# Altium PCB shkb.PcbDoc (part 2 of 3)
Units mil, origin at the board's own origin, x right, y up, seen from the top; angles counter-clockwise.
Board outline 5570.88 x 1417.33 mil, 4 copper layers (COMPONENT, GND1, GND2, SIGNAL), stack 63.78 mil thick; 142 components, 135 nets, 597 pads, 700 vias.
Unrouted connection lines stored in the file: 1.
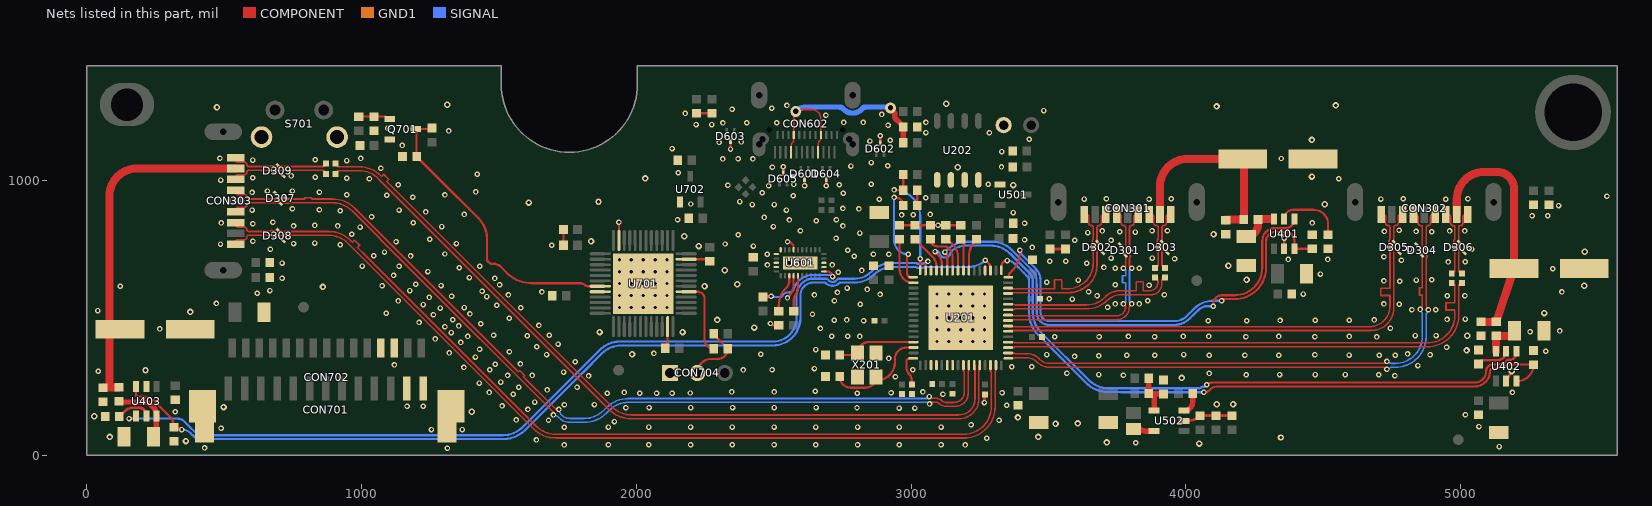
[diagram p4: the nets of this part, all layers, seen from the top]

## Via types
v1: diameter 20, hole 10, COMPONENT to SIGNAL, tented both sides, 543 vias
v2: diameter 23.62, hole 11.81, COMPONENT to SIGNAL, tented both sides, 94 vias
v3: diameter 20, hole 11.81, COMPONENT to SIGNAL, 28 vias
v4: diameter 23.62, hole 11.81, COMPONENT to SIGNAL, tented bottom, 25 vias
v5: diameter 39.37, hole 19.68, COMPONENT to SIGNAL, tented both sides, 10 vias

## Nets (pads, with @x,y where several pads share a name; then routed paths per layer and width w, separated by ;. In a path a pad name is that pad's centre, name@x,y a point inside that pad or via, vN(x,y) a via of type N, cw(c..) or ccw(c..) an arc to the next point about the centre after c; other vN are vias at no path point) (continued)
GND: C201.1 C202.1 C203.2 C204.1 C205.1 C206.1 C207.1 C208.1 C209.1 C210.1 C211.1 C212.1 C213.1 C214.1 C215.1 C216.1 C217.1 C301.1 C304.1 C307.1 C310.1 C311.1 C312.1 C313.1 C314.1 C315.1 C401.1 C402.1 C403.1 C404.1 C405.1 C406.1 C407.1 C408.1 C409.1 C501.1 C502.1 C503.1 C504.1 C505.1 C507.1 C508.1 C601.1 C602.1 C607.1 C702.2 C703.1 C704.1 C705.1 C706.1 C707.1 C708.1 C709.1 CON201.2 CON701.1 CON701.2 CON701.14 CON702.12 CON702.13 CON702.16 CON704.1 D301.3 D302.3 D303.3 D304.3 D305.3 D306.3 D307.3 D308.3 D309.3 D601.3 D602.3 D603.3 D604.3 D605.3 L304.1 L305.1 L306.1 L602.1 Q701.2 R205.2 R206.1 R207.1 R208.1 R209.1 R210.1 R214.1 R401.2 R402.2 R403.2 R404.2 R405.2 R406.2 R503.2 R604.2 R702.2 R703.2 S701.3 U201.65 U202.1 U202.2 U202.3 U202.4 U401.2 U402.2 U403.2 U501.1 U502.2 U601.4 U601.12 U601.13 U601.22 U601.28 U601.29 U601.31 U701.8 U701.23 U701.35 U701.47 U702.1 X201.2 X201.4 | length 1877.5
  COMPONENT w7.87: C704.1@1734.41,764 C706.1@1734.41,821 ; v1@1936,848 v1(1936.26,848) U701.47@1936.26,790.66 ; C703.1@2104.41,389 ccw(c2104.41,398.02) 2113.43,398.02 U701.23@2113.43,457.98 ; U701.35@2191.18,712.9 2259.51,712.9 cw(c2259.51,705.41) C705.1@2267,705.41 ; v1(2342.52,1113.95) D603.3@2342.52,1141.73 ; v1(2488,479) 2494.59,472.41 R604.2@2518,472.41 ; D605.3@2534.42,1026.06 v1(2534.43,1049.69) ; v1(2550,777) cw(c2550,754.62) 2572.38,754.62 U601.22@2572.38,747.24 ; v1(2611.98,980.31) D601.3@2612,1003.94 ; v1(2690.98,980.31) D604.3@2691,1003.94 ; U401.2@4358,750.87 v1(4358,789)
  COMPONENT w8: v1@2550,578 v1(2550,572) 2551.74,573.74 ccw(c2501.91,623.57) 2572.38,623.57 U601.4@2572.38,652.76 ; v1(2735,666) v1@2735,671
  COMPONENT w10: L602.1@2218.5,1244.09 C315.1@2275.5,1244.09 ; D602.3@2887.22,1134.52 v1(2887.22,1162.3) ; C210.1@2919.02,689.02 C210.1@2919.02,697.98 ; C203.2@2958.02,836.61 R209.1@3070,836.61 R214.1@3126,836.61 R208.1@3181,836.61 ; R210.1@3022.59,908 R205.2@3022.6,964 ; v1(3267,191) 3267,219.28 C217.1@3269,221.28 ; L304.1@3505,750.41 C314.1@3562,750.41 ; U502.2@3992.88,124.28 4005.12,124.28 ccw(c4005.12,190.58) 4052,143.7 C504.1@4110,143.7 C508.1@4168,143.7 ; U402.2@5165.83,269.42 v2(5186,306)
  COMPONENT w19.68: C301.1@4144.41,804 C301.1@4145,803.41 ; C403.1@4220,689.85 C403.1@4226,683.85
  GND1 w8: v3(3094.08,456.44) v3(3137.39,456.44) ; v3(3137.39,499.75) v3(3137.39,543.06) ; v3(3137.39,586.36) v3(3137.39,543.06) ; v3(3180.69,586.36) v3(3180.69,543.06) ; v3(3224,413.14) v3(3224,456.44) ; v3(3224,499.75) v3(3224,456.44) ; v3(3224,543.06) v3(3224,586.36) ; v3(3267.31,456.44) v3(3224,456.44) ; v3(3137.39,543.06) v3(3180.69,543.06) ; v3(3180.69,543.06) v3(3180.69,499.75) v3(3180.69,456.44) v3(3224,456.44)
  GND1 w10: v3(3094.08,499.75) v3(3137.39,499.75) ; v3(3224,499.75) v3(3224,543.06)
  other v1: 1312,25 428,26 5141,31 1737,37 3197,37 1898,38 2045,38.01 2197,38.02 2349,38.02 2501,38.03 2653,38.04 2805,38.05 2957,38.06 3109,38.06 3818,45 1636,55 3275,61 1254,93 1366,93 488,98 1737,100.99 1898,101.99 2045,102 2197,102.01 2349,102.02 2501,102.02 2653,102.03 2805,102.04 2957,102.05 3109,102.06 5067,104 3218,110 1920,122 1680,127 3320,127 1563,128 5018,147 321,158 1605,166 2956,171 3014,171 1962,172 2803,172 2046,172.96 2198,172.97 2350,172.98 2502,172.98 2654,172.99 1164.95,178 1224,178 1511,179 3348,181 1738,183 1847,184 1630,193 1552,221 3116,221 1894,225 2012,225 2073.5,225 2130,225 2804,225 2196,226 2927,227 3330.99,227 1464,228 1956,228 5189,228 2347,230 2502,230 3043,230 2651,232 1675,237 1572,247 1784,247 1428,262 1506,266 2943,285 1826,288 4761,289 1531,290 1621,290 3773,291 4220,292 4702,292 3683,293 4341,293 4471,293 4580,293 4085,297 3567,298 1735,302 41,305 2389,310 1466,311 2494,311 3006,311 2648,315 1372,319 3366,322 3439,322 4845,326 1119,328 1486,331 1578,332 1777,340 2919,352 1414,357 3595,359 3683,362 3785,363 3887,363 4085,363 4215,363 4338,363 4704,363 4762,363 4594,364 4470,365 4889,365 1673,366 3494,366 3992,366 2453,367 4807,368 2064,370 1319,372 1538,376 5310,378 2653,384 1429,385 4949,393 1637,394 1715,404 1361,410 1268,423 4695,430 3523,431 3684,431 3886,431 4219,431 4470,431 1386,432 2813,432 3791,432 3991,432 4083,432 4338,432 4595,432 2711,433 2769,433 1603,434 4835,435 4911,435 1480,436 1683,436 1326,446 5253,449 5361,452 265,459 2670,461 4745,462 1303,467 1353,470 1645,472 1433,478 1209,483 2827,489 4082,489 4222,489 4343,490 2720,491 4471,491 4595,491 2766,492 4686,492 1331,493 4951,494 5017,495 1537,498 1261,511 2641,513 1394,514 1089,516 39,526 4823,529 4910,529 1286,535 1579,536 1373,537 3715,538 1492,545 1224,548 2815,549 4777,549 3743,550 3830,550 4721,550 471,552 1133,561 2721,562 3861,562 3587,568 3503,569 1246,574 1455,577 1327,578 3677,580 4952,580 5016,580 1534,583 2648,583 3922,584 2887,585 4427,586 620,589 2732,592 1656,594 5369,594 3646,595 1438,596 666,599 1175,599 2840,603 2767,608 121,615 1074,616 1289,617 3866,618 1502,620 3743,620 1197,622 3494,629 4779,633 4721,634 3608,637 4839,637 4895,638 1484,643 710,644 1392,646 1116,654 4490,659 1241,668 2820,672 5336,678 3743,680 3830,680 1355,682 3702,683 1136,687 1430,687 1002,688 2477,692 2713,692 3639,698 710,699 4955,703 5017,704 3505,706 3563,706 4785,709 4373,712 4517,712 3959,715 3728,717 3878,717 4721,722 2793,724 1178,725 1044,726 2476,731 2863,731 2919.1,731 1303,732 1083,739 2769,746 4815,748 668,749 5040,750 3441,756 2426,761 1692,764 922,766 486,768 2322.82,768.38 752,770.01 1345,770 829,772.01 1125,777 604,778.01 3596,782 3728,782 3413,784 1248,786 2727,789 2370.82,802.38 964,804 2813,808 3643,810 3816,812 3759,813 4895,813 4723,814 4838,814 3696,816 4960,816 5015,816 2597,817 3877,817 3933,817 4776,818 994,830 1291,832 2499,832 752,834 913,834 2752,834 829,836 3098,837 604,842 3413,844 489,845 4460,845 1188,846 677,848 2655,853 2557,856 2150,857 2728,857 2465,865 1036,868 5260.27,871 5317.35,871 2965,874 3008,875 1373,876 3070,876 3372,883 1233,885 922,889 601,892.01 1136,892 2546,892 846,893.01 2810,896 748,897.01 2752,898 5356.76,908.41 2422,912 2502,912 2198,914 2376,923 2884,931 3866,931 4946.12,931 3630,932 4710.12,932 3711,933 3947,933 4791.12,933 5027.12,933 3053,937 1186,939 5533,942 2571,944 1091,946 1303,947 946,948 2753,953 2458,955 601,956 846,957 1415,958 657,961 748,961 2481,980 2333,982 1133,984 2738,984 2573,985 2855,986 3281,986 487,1001 1028,1006 4557,1006 946,1008.01 603,1010.01 831,1011.01 744,1016 1421,1022 2152,1028 1070,1044 2495,1048 3329,1049 2781,1052 2915,1053 2855,1065 946,1072 603,1074 831,1075 2314,1078 2424,1078 2370,1079 997,1080 4347.65,1079.64 484,1081 3330,1105 2130,1116 1148,1127 2301,1138 2382,1140 2850,1143 2924,1146 3430,1150 3285,1173 3054,1174 1317,1180 1095,1189 2916,1201 2217,1203 2274,1203 2315,1209 2401.95,1209.67 2511,1210 2755,1211 2826,1211 3054,1211 2690,1237 2893,1240 2177.4,1243.6 3483,1254 2348,1259 2493,1263 2548,1273
  other v2: 4049,42 3712,46 360,51 4346,64 83,66 3463,66 3526,114 3607,115 3389,137 26,141 1401,158 497,175 4113,185 4172,185 3985,281 213,309 1984,367 5022,381 5024,434 1866,448 2168,448 2429,464 2294,492 5305,517 376,521 859,612 2248,615 5450,616 2367,622 4221,638 2322,673 4155,689 5452,740 2227,761 1835,778 2174,797 4101,804 4506,913 1608,919 1862,922 3372,983 2032,1007 4459,1014 3170,1048 4459,1147 473,1266 4112,1269 4546,1273 1311,1275 3128,1279
  other v3: 3094.08,413.14 3137.39,413.14 3180.69,413.14 3267.31,413.14 3267.31,499.75 3094.08,543.06 3267.31,543.06 3094.08,586.36 3267.31,586.36 2556.63,700 2596,700 2635.37,700
  other v4: 1938.23,537.7 1981.54,537.7 2024.84,537.7 2068.15,537.7 2111.46,537.7 1938.23,581.01 1981.54,581.01 2024.84,581.01 2068.15,581.01 2111.46,581.01 1938.23,624.31 1981.54,624.31 2024.84,624.31 2068.15,624.31 2111.46,624.31 1938.23,667.62 1981.54,667.62 2024.84,667.62 2068.15,667.62 2111.46,667.62 1938.23,710.93 1981.54,710.93 2024.84,710.93 2068.15,710.93 2111.46,710.93
LED: R705.2 U701.29 | length 272.6
  COMPONENT w8: U701.29@2191.18,594.79 2222.21,594.79 cw(c2222.21,569) 2248,569 2248,420.41 ccw(c2281.41,420.41) R705.2@2281.41,387
NetC201_2: C201.2 U201.62 X201.1 | length 386.8
  COMPONENT w8: C201.2@2739.59,286 ccw(c2780.59,286) 2780.59,245 2832.77,245 ccw(c2832.77,284.69) X201.1@2872.46,284.69 ; X201.1@2874,271.69 2874.46,271.69 ccw(c2874.46,338.23) 2941,338.23 2941,350 cw(c2982.48,350) 2982.48,391.48 U201.62@3008.45,391.48
NetC202_2: C202.2 U201.61 X201.3 | length 299.6
  COMPONENT w8: C202.2@2739.59,364 2798.23,364 ccw(c2798.23,371.31) X201.3@2805.54,371.31 cw(c2845.4,371.31) 2845.4,411.17 U201.61@3008.45,411.17 ; X201.3@2804.84,361 X201.3@2807.54,358.31
NetC203_1: C203.1 U201.50 | length 242.5
  COMPONENT w8: 2958,726.31 2958,744.98 ; C203.1@2958,785.37 2958,749 ; C203.1@2958,785.41 2958,749 ; U201.50@3008.45,627.7 3003.3,627.7 cw(c3003.3,668) 2982.54,633.46 cw(c3003.3,668) 2973.49,640.88 cw(c3010.88,678.28) 2958,678.28 2958,726.27 2958,744.98 ; 2958,744.98 2958,749
NetC301_2: C301.2 C310.2 CON301.1 L301.2 | length 750.9
  COMPONENT w29.53: CON301.1@3906.1,875.98 3906.1,978 cw(c4006.1,978) 4006.1,1078 C310.2@4207.05,1078 cw(c4207.05,1073.64) 4211.41,1073.64 L301.2@4211.41,858 4148.41,858 ccw(c4148.41,854.59) C301.2@4145,854.59
NetC304_2: C304.2 C311.2 CON302.1 L302.2 | length 906.9
  COMPONENT w29.53: CON302.1@4986.22,875.98 4986.22,931 cw(c5086.22,931) 5086.22,1031 5133,1031 cw(c5133,969) 5195,969 5195,679 C311.2@5194.88,679 L302.2@5130,485.09 C304.2@5074,485.09
NetC307_2: C307.2 C312.2 CON303.1 L303.2 | length 1259.5
  COMPONENT w29.53: C307.2@58,245.59 113.59,245.59 ccw(c113.59,249) L303.2@116,246.59 ; 81.89,258.62 81.89,943.31 cw(c181.89,943.31) 181.89,1043.31 CON303.1@541.34,1043.31
NetC403_2: C403.2 L301.1 U401.6 | length 135
  COMPONENT w29.53: C403.2@4220,796.15 ccw(c4220,838.74) 4262.59,838.74 L301.1@4262.59,858 4263.72,859.13 U401.6@4311,859.13
NetC406_2: C406.2 L302.1 U402.6 | length 134.4
  COMPONENT w29.53: U402.6@5128.43,377.69 5128.43,432.33 cw(c5130,432.33) L302.1@5130,433.91 5178.04,433.91 ccw(c5178.04,452.55) C406.2@5196.68,452.55
NetC409_2: C409.2 L303.1 U403.6 | length 242.1
  COMPONENT w19.68: L303.1@116,195.41 ccw(c118.02,195.41) 118.02,193.39 201.87,193.39 cw(c201.87,141.87) U403.6@253.4,141.87 ; C409.2@251.4,80.75 U403.6@251.4,154.87
NetC506_1: C506.1 R502.2 R503.1 U502.4 | length 171.6
  COMPONENT w20: R502.2@3864.59,280 cw(c3864.59,279) 3865.59,279 C506.1@3865.59,224 ccw(c3867.18,224) 3867.18,222.41 3884.62,222.41 ; U502.4@3884.62,161.69 3884.62,222.41 ; R503.1@3919,222.41 3884.62,222.41
NetC601_2: C601.2 CON602.A4 CON602.A9 CON602.B4 CON602.B9 L601.1 | length 980
  COMPONENT w6: CON602.A9@2563.07,1102.36 2563.07,1125.1 cw(c2579.9,1125.1) 2568,1137 ccw(c2556.14,1148.86) 2572.91,1148.86 CON602.B4@2572.91,1165.35 2572.91,1233.89 cw(c2597.11,1233.89) v5@2577.95,1248.67 ; v5@2577.95,1251 v5@2577.95,1248.67 ; CON602.A4@2661.5,1102.36 2661.5,1131.13 cw(c2676.87,1131.13) 2666,1142 ccw(c2653.11,1154.89) 2671.34,1154.89 CON602.B9@2671.34,1165.35 2671.34,1224.66 ccw(c2638,1224.66) 2638,1258 2587,1258 ccw(c2587,1251) 2580,1251 ccw(c2597.11,1233.89) v5@2577.95,1248.67
  COMPONENT w19.68: v5(2925,1264) 2927.91,1261.09 cw(c2881.82,1215) 2939.82,1244.74 2939.82,1234.27 ccw(c2955.66,1234.27) 2946.7,1221.2 2971.41,1196.5 C601.2@2971.41,1194 L601.1@2971.41,1137.02
  SIGNAL w19.68: v5(2925,1264) ccw(c2922,1264) v5@2922,1267 ; 2596.76,1262.43 cw(c2618.63,1212.37) 2618.63,1267 2738.24,1267 cw(c2738.3,1247.31) 2753.06,1260.34 ccw(c2787.09,1290.35) 2821.11,1260.34 cw(c2835.87,1247.31) 2835.93,1267 2866.88,1267 ; 2596.76,1262.43 ccw(c2618.63,1212.37) 2580,1251 2585.33,1251 2596.76,1262.43 ; 2866.88,1267 ccw(c2866.82,1247.31) 2866.82,1267 v5@2922,1267 ; 2866.88,1267 v5@2922,1267
  other v5: 2580,1251
NetC701_2: C701.2 Q701.1 R703.1 | length 114.9
  COMPONENT w8: C701.2@989.24,1232.19 1082.23,1232.19 cw(c1082.23,1204.23) Q701.1@1102,1224
NetCON704_2: CON704.2 R704.2 R705.1 | length 236.6
  COMPONENT w8: CON704.2@2222,299 cw(c2273,299) 2273,350 2295.59,350 ccw(c2295.59,387) R705.1@2332.59,387 2284.11,435.48 cw(c2290.63,442) R704.2@2281.41,442
NetL501_1: L501.1 U502.5 | length 66.9
  COMPONENT w20: L501.1@3822.06,103 ccw(c3860.97,141.91) 3860.97,86.88 U502.5@3884.62,86.88
NetR201_2: R201.2 U201.39 | length 123.1
  COMPONENT w8: U201.39@3210.22,671.99 3210.22,721.22 cw(c3298.18,721.22) 3235.98,783.42 R201.2@3238,785.43 R201.2@3238,787.41
NetR204_1: R204.1 R205.1 U201.48 | length 440.7
  COMPONENT w8: v1(2938,965) 2971.59,965 2973,966.41 2972.41,967 ccw(c2972.41,965.59) 2971,965.59 2971,1021 R204.1@2971.41,1021 ; U201.48@3033.06,672.98 v1(3033.06,714.38)
  SIGNAL w8: v1(2938,965) cw(c2938,869.94) 3033.06,869.94 3033.06,821 v1(3033.06,714.38)
NetR206_2: R206.2 U201.64 | length 120.7
  COMPONENT w7.99: R206.2@3002.01,256.73 R206.2@3003,257.72 3002.01,258.7 3002.01,274.12 ccw(c2974.22,274.12) 2991.12,296.19 cw(c3006,311) 2990.62,296.7 cw(c3006,311) 2985.65,305.81 ccw(c2975.96,303.34) 2985.34,306.81 cw(c3020.56,319.86) 2985,307.77 cw(c3020.56,319.86) 2983,319.86 2983,326 2983,340.91 cw(c2993,340.91) 2989.24,350.18 cw(c2999.11,326) 2999.11,352.11 U201.64@3007.47,352.11
NetR207_2: R207.2 U201.45 | length 143.9
  COMPONENT w8: R207.2@3014,785.41 3079.63,719.78 cw(c3049.5,689.65) 3092.11,689.65 U201.45@3092.11,671.99
NetR208_2: R208.2 U201.40 | length 119.5
  COMPONENT w8: R208.2@3180.69,785.43 3180.69,787.1 R208.2@3181,787.41 ; R208.2@3181,785.43 3190.54,775.9 U201.40@3190.54,671.99
NetR209_2: R209.2 U201.42 | length 158.3
  COMPONENT w8: R209.2@3070,785.43 ccw(c3095.75,785.43) 3086.31,761.48 ccw(c3089.28,768.91) 3088.63,760.93 cw(c3087,741) 3093.05,760.06 ccw(c3095.47,767.69) 3095.45,759.69 ccw(c3095.75,785.43) 3095.75,759.69 3114.35,759.69 cw(c3114.35,718.03) 3121.26,759.11 ccw(c3122.58,767) 3122.7,759 cw(c3123,739) 3137.32,752.97 cw(c3103.87,719.53) 3137.43,752.85 cw(c3103.87,719.53) 3151.17,719.53 U201.42@3151.17,682.08
NetR210_2: R210.2 U201.49 | length 383.6
  COMPONENT w8: v1(2938,938) 2941.41,938 cw(c2941.41,908) R210.2@2971.41,908 ; v1@2990,725 ccw(c2990,720.43) 2985.43,720.43 2985.43,686 2985.43,660.96 ccw(c2999,660.96) 2999,647.39 U201.49@3007.47,647.39
  SIGNAL w8: v1(2938,938) 2938,783 ccw(c2990,783) v1(2990,731)
NetR214_2: R214.2 U201.41 | length 133.5
  COMPONENT w8: R214.2@3126,785.08 R214.2@3126,785.43 3132.65,785.43 3151.75,766.33 cw(c3105.64,720.22) 3170.85,720.22 U201.41@3170.85,671.99
NetR401_1: R401.1 U201.32 U401.3 | length 1644.1
  COMPONENT w8: U201.32@3353.92,647.39 cw(c3376.94,647.39) 3360.66,663.66 3366.97,669.97 ccw(c3296.26,740.69) 3396.26,740.69 v1(3396.26,746) ; v1@4130,562 cw(c4137.72,559.9) 4137.76,567.9 4178,567.9 ccw(c4178,681.9) 4209.05,572.21 ccw(c4178,681.9) 4292,681.9 4292,779 cw(c4325,779) 4311.22,808.99 cw(c4325,779) 4325,812 4362.27,812 cw(c4362.27,778.87) 4395.4,778.87 U401.3@4395.4,751.41 ; R401.1@4460,751.41 U401.3@4395.4,751.41 ; U401.3@4395.4,751.41 cw(c4365.27,750.87) U401.3@4395.4,750.87 U401.3@4395.4,751.41
  SIGNAL w8: v1(3396.26,746) ccw(c3419.11,746) 3402.96,729.84 3444.87,687.93 cw(c3435,678) 3445.27,687.52 3454.12,678.04 cw(c3409,635.75) 3470.84,636.1 3471,614.26 3471,614.06 3471,595 3471,551 ccw(c3557,551) 3471.26,544.38 ccw(c3557,551) 3471.26,544.33 cw(c3457.3,543.23) 3471.27,542.31 ccw(c3479.26,541.79) 3471.26,541.79 3471.26,518.26 ccw(c3501.52,518.26) 3478.47,498.65 ccw(c3501.52,518.26) 3501.52,488 3958.99,488 ccw(c3958.99,550.8) 4003.39,506.39 4015.5,518.5 ; 4028.04,530.84 4015.6,518.4 4029.91,532.71 cw(c4100.62,462) 4078.53,559.53 cw(c4100.62,462) 4100.62,562 v1(4130,562)
NetR402_1: R402.1 U401.5 | length 247.9
  COMPONENT w7.87: U401.5@4358,859.13 4358,860 cw(c4391,860) 4391,893 4465,893 cw(c4465,840) 4518,840 4518,803.6 cw(c4517,803.6) R402.1@4517,802.6
NetR403_1: R403.1 U201.33 U402.3 | length 2395.1
  COMPONENT w8: U201.33@3328.33,672.98 3328.33,686.33 cw(c3350,686.33) 3328.65,690.06 cw(c3350,686.33) v1(3350,708) ; v1(4066,229) 4067,228 ccw(c4067,254.56) 4085.78,235.78 4088.91,238.91 cw(c4115.23,212.58) 4115.23,249.81 5051.81,249.81 ccw(c5051.81,305) 5084.88,260.82 ccw(c5051.81,305) 5107,305 cw(c5118,305) 5118,316 5135.27,316 ccw(c5135.27,330) 5136.93,316.1 cw(c5138.36,304.19) 5137.51,316.16 ccw(c5133.14,377.69) 5168.62,327.23 cw(c5175.52,317.41) 5175.57,329.41 R403.1@5266,329.41 cw(c5206.01,329.41) 5206.01,269.42 U402.3@5203.23,269.42
  SIGNAL w8: v1(3350,708) cw(c3350,670.82) 3376.29,697.11 3409.7,663.7 3423.29,649.51 cw(c3409,635.75) 3428.84,635.84 3429,614 3429,518.22 ccw(c3543,518.22) 3462.39,437.61 3515,385 3637.42,262.58 ccw(c3718.03,343.19) 3637.48,262.52 ccw(c3718.03,343.19) 3718.03,229.19 3764,229.19 ; 3764,229 v1(4066,229)
NetR404_1: R404.1 U402.5 | length 127.2
  COMPONENT w10: R404.1@5065,331.41 cw(c5078.59,331.41) 5078.59,345 5133.14,345 ccw(c5133.14,377.69) U402.5@5165.83,377.69
NetR405_1: R405.1 U201.35 U403.3 | length 3557.2
  COMPONENT w8: U403.3@178.6,250.13 178.6,216.67 ccw(c185.17,221.24) 185.17,213.24 201.87,213.24 cw(c201.87,141.87) 262.37,179.73 299.49,142.61 cw(c257.22,100.34) 317,100.34 327.28,100.34 cw(c327.28,75.28) v1@345,93 ; v1(3270.16,709.58) 3282.32,697.42 ; 3282.33,697.41 cw(c3266.29,681.39) U201.35@3288.96,681.39
  SIGNAL w8: v1@345.47,93.07 cw(c345.47,48.34) 377.04,80.02 cw(c345.47,48.34) 377.1,79.97 385.96,71.1 ccw(c420,105.14) 401.88,60.54 ccw(c410.27,80.88) 407.02,59.12 ccw(c420.07,150.07) 420.07,58.19 1514.68,58.19 ccw(c1514.68,172.19) 1530.96,59.36 ccw(c1514.68,172.19) 1595.34,91.62 1796.36,292.64 cw(c1855.16,233.84) 1803.43,298.95 1874.19,369.71 cw(c1944.9,299) 1944.9,399 2497,399 ccw(c2497,499) 2597,499 2597,580.78 cw(c2644.22,580.78) 2631.95,626.38 ccw(c2629.87,634.1) 2632.77,626.65 cw(c2640,608) 2641.25,627.96 ccw(c2641.75,635.94) 2642.11,627.95 cw(c2644.22,580.78) 2644.22,628 2684.57,628 cw(c2684.61,620) 2690.21,625.71 ccw(c2714,650) 2737.79,625.71 cw(c2743.39,620) 2743.43,628 2794.64,628 ccw(c2794.64,727.36) 2804.21,628.46 ccw(c2794.64,727.36) 2864.93,657.13 cw(c2932.21,589.85) 2932.21,685 3013.86,685 cw(c3013.9,677) 3013.94,685 cw(c3013.9,677) 3014.36,684.99 cw(c3013.9,677) 3017.55,684.12 ccw(c3033.06,714.38) 3033.06,680.38 ccw(c3033.06,714.38) 3048.56,684.12 cw(c3052.21,677) 3051.75,684.99 cw(c3052.21,677) 3052.17,685 cw(c3052.21,677) 3052.25,685 3210.82,685 ccw(c3210.82,768.92) v1(3270.16,709.58)
  other v1: 345,93
NetR406_1: R406.1 U403.5 | length 128.8
  COMPONENT w10: R406.1@117.59,141 ccw(c117.59,144.4) 119.99,141.99 138,160 cw(c168.3,129.7) 162.45,172.15 cw(c168.3,129.7) 167.2,172.54 167.26,172.54 cw(c167.77,161.55) 167.77,172.55 189.43,172.55 cw(c189.43,145.98) 216,145.98 U403.5@216,141.87
NetR501_2: R501.2 U502.3 | length 80.4
  COMPONENT w19.68: U502.3@3992.88,161.69 ccw(c3992.88,193.39) 4024.59,193.39 R501.2@4024.59,224
NetR602_1: R602.1 U601.11 | length 351.7
  COMPONENT w7.87: R602.1@2461,575.59 2464,578.59 2464.18,578.41 v1(2490,578.41) ; U601.11@2682.61,668.5 2695.5,668.5 cw(c2695.5,650) v1(2714,650)
  SIGNAL w7.87: 2478,576 2524.85,576 ccw(c2524.85,583.87) 2531.97,580.51 cw(c2550,572) 2551.59,591.87 ccw(c2550,572) 2547.67,591.8 ; 2551.64,591.87 ccw(c2552.22,599.72) 2552.69,591.86 ccw(c2550.8,621) 2569.83,598.86 ccw(c2564.76,604.88) 2572.29,602.56 ; 2572.3,602.6 cw(c2644.22,580.78) 2579.03,618.19 ; 2580,621 cw(c2572.2,622.11) 2579.05,618.22 ; v1(2714,650) 2708.06,655.94 2640,655.94 ccw(c2640,608) 2637.77,655.89 ccw(c2640.11,602.99) 2619.67,651.83 cw(c2616.63,659.1) 2619.25,651.67 ccw(c2644.22,580.78) 2579.05,618.22
NetR603_1: R603.1 U601.5 | length 141.1
  COMPONENT w8: R603.1@2573,523.59 2573,566.4 cw(c2599.5,566.4) 2575.77,578.2 ; U601.5@2588.13,652.76 2588.13,611.72 cw(c2536.48,611.72) 2580.76,585.14 ; 2575.77,578.2 cw(c2599.5,566.4) 2580.76,585.14 ; 2575.77,578.2 ccw(c2536.48,611.72) 2580.76,585.14
NetR604_1: R604.1 U601.3 | length 139.6
  COMPONENT w7.87: R604.1@2518,523.59 2518,543.22 cw(c2611.78,543.22) 2537.68,600.7 2544.55,607.57 ccw(c2515.4,636.72) 2549.53,613.59 ccw(c2515.4,636.72) 2556.63,636.72 U601.3@2556.63,652.76
NetU201_3: U201.3
NetU201_4: U201.4
NetU201_6: U201.6
NetU201_7: U201.7
NetU201_36: U201.36
NetU201_43: U201.43 U401.4 | length 1844.3
  COMPONENT w8: v1(3123,739) cw(c3102.52,718.52) 3130.68,725.28 cw(c3102.52,718.52) 3131.48,718.52 U201.43@3131.48,671.99 ; v1@4100,536 v1(4100,541.93) 4100,549.91 cw(c4131.99,549.91) 4121.44,580.11 ccw(c4118.8,587.66) 4121.96,580.31 ; 4122,580.33 cw(c4130,562) 4131.99,581.9 4178,581.9 ccw(c4178,681.9) 4278,681.9 4278,779 cw(c4325,779) 4325,826 4362.27,826 ccw(c4362.27,859.13) U401.4@4395.4,859.13
  SIGNAL w8: v1(3123,739) 3131.52,747.52 cw(c3202.23,676.81) 3202.23,776.81 3294.77,776.81 cw(c3294.77,676.81) 3365.48,747.52 3435,678 3443.91,668.46 cw(c3409,635.75) 3456.84,636.02 3457,614.15 3457,614 3457,551 ccw(c3557,551) 3457.3,543.23 3457.26,543.18 3457.26,518.26 ccw(c3501.52,518.26) 3501.52,474 3958.99,474 ccw(c3958.99,550.8) 4013.29,496.5 4023.62,506.82 cw(c4029.29,501.18) 4024.31,507.44 ccw(c4015.6,518.4) 4025.47,508.47 4038,521 4039.87,522.87 ; 4025.5,508.5 4039.87,522.87 ; 4047.17,529.37 ccw(c4100.62,462) 4039.87,522.87 ; v1(4100,541.93) 4070.49,541.93 ccw(c4070.45,533.93) 4067.4,541.32 ccw(c4100.62,462) 4039.87,522.87
NetU201_44: U201.44 U402.4 | length 2591.5
  COMPONENT w8: v1(3087,741) 3097.03,730.97 cw(c3061.38,695.32) 3111.8,695.32 U201.44@3111.8,671.99 ; v1@4076,256 cw(c4094.86,237.14) 4083.06,261.06 cw(c4094.86,237.14) 4094.86,263.81 5051.81,263.81 ccw(c5051.81,305) 5093,305 cw(c5118,305) 5118,330 5135.27,330 ; 5135.27,330.05 ccw(c5133.14,377.69) 5166.47,343.58 cw(c5174.86,335) 5174.91,347 5179,347 ccw(c5179,371.23) 5197.58,355.67 ccw(c5179,371.23) 5198.31,356.6 ccw(c5179,371.23) 5203.23,371.23 U402.4@5203.23,377.69
  SIGNAL w8: v1(3087,741) 3095.61,741 cw(c3095.65,733) 3103.46,734.71 ccw(c3123,739) 3123,719 ccw(c3123,739) 3142.68,735.45 ; 3142.69,735.5 ccw(c3123,739) 3142.79,736.08 cw(c3150.7,734.91) 3146.26,741.57 3147.18,742.18 ccw(c3142.74,748.84) 3148.14,742.93 3151.36,746.15 cw(c3202.23,676.81) 3202.23,762.81 3288.97,762.81 cw(c3288.97,662.81) 3359.68,733.52 3421.6,671.6 3433.46,659.14 cw(c3409,635.75) 3442.84,635.96 3443,614.1 3443,614 3443,518.22 ccw(c3543,518.22) 3472.29,447.51 3647.32,272.48 ccw(c3718.03,343.19) 3718.03,243.19 4045.07,243.19 ccw(c4045.07,286.93) 4050.15,243.49 ccw(c4049.24,251.43) 4053.19,244.47 ccw(c4049.24,251.43) 4054.03,245.02 cw(c4066,229) 4064.96,248.97 ccw(c4064.55,256.96) 4068.87,250.23 ccw(c4045.07,286.93) v1(4076,256)
NetU201_46: U201.46
NetU201_47: U201.47 U403.4 | length 3319.8
  COMPONENT w8: v1(153,133) 169.73,133 ccw(c169.73,141.87) U403.4@178.6,141.87 ; U201.47@3052.74,671.99 3052.74,696.74 v1(3061,705)
  SIGNAL w8: v1(153,133) 327.65,133 cw(c327.65,93.88) 355.3,121.56 373.43,103.43 395.83,81.03 ccw(c420,105.14) 407.25,73.47 ccw(c410.27,80.88) 409.07,72.97 ccw(c420.07,150.07) 412.82,72.53 ccw(c420.07,150.07) 420.07,72.19 1514.68,72.19 ccw(c1514.68,172.19) 1585.4,101.48 1769.46,285.54 1786.46,302.54 1867.63,383.71 cw(c1938.34,313) 1938.34,413 2497,413 ccw(c2497,499) 2544.7,427.44 ccw(c2497,499) 2583,499 2583,580.78 cw(c2644.22,580.78) 2587.17,602.99 cw(c2644.22,580.78) 2627.7,639.73 ccw(c2625.55,647.43) 2628.3,639.92 cw(c2640,608) 2640,642 cw(c2640,608) 2641.49,641.97 ccw(c2641.85,649.96) 2642.12,641.96 cw(c2644.22,580.78) 2642.8,641.98 cw(c2644,598) 2644,642 2690.98,642 cw(c2691.02,634) 2691.06,642 cw(c2691.02,634) 2694.52,641.19 cw(c2691.02,634) 2697.59,638.57 ccw(c2714,650) 2699.83,635.89 ccw(c2714,650) 2699.89,635.83 ccw(c2714,650) 2714,630 ccw(c2714,650) 2730.41,638.57 cw(c2736.98,634) 2737.02,642 2794.64,642 ccw(c2794.64,727.36) 2854.96,666.96 ccw(c2794.64,727.36) 2855,667 2857.71,669.71 cw(c2928.42,599) 2928.42,699 3017.61,699 cw(c3017.65,691) 3017.69,699 cw(c3017.65,691) 3020.8,698.35 cw(c3017.65,691) 3022.05,697.68 ccw(c3033.06,714.38) 3033.06,694.38 ccw(c3033.06,714.38) 3044.77,698.16 cw(c3049.45,691.68) 3045.72,698.76 cw(c3049.45,691.68) 3046.23,699 cw(c3049.45,691.68) 3047.72,699.49 ccw(c3043.27,719.49) v1@3057.75,705
NRST: C702.1 Q701.3 R701.2 U701.7 | length 1073.5
  COMPONENT w8: R701.2@1256,1190.59 cw(c1246.36,1200.23) 1246.36,1186.6 Q701.3@1196.49,1186.6 cw(c1188.41,1178.52) 1199.83,1178.52 C702.1@1199.83,1086.6 1211.58,1074.8 cw(c1206.46,1068.66) 1212.12,1074.32 1272.07,1014.37 ccw(c1285,1027.27) 1273.59,1013 cw(c1268.57,1006.77) 1274.34,1012.31 ccw(c1356,1090.42) 1276.14,1010.47 1426.71,859.9 cw(c1356,789.19) 1456,789.19 1456,716 ccw(c1476,716) 1481.52,696.78 cw(c1483.67,689.07) 1488.09,695.74 ccw(c1507,724) 1496.6,691.63 ccw(c1507,724) 1498.8,691 cw(c1496.84,683.25) 1502.5,688.9 1528.07,663.33 ccw(c1618.58,753.85) 1618.58,625.85 1796.47,625.85 cw(c1796.47,602.47) 1813,619 ccw(c1823.92,629.92) 1823.92,614.48 U701.7@1858.51,614.48
OUT1: U601.26
OUT2: U601.25
P1_D_N: CON301.2 D301.2 U201.24 | length 848.1
  COMPONENT w6: U201.24@3352.94,489.91 3367.76,489.91 3370.6,492.75 3747.75,492.75 ccw(c3747.75,540) 3795,540 3795,542 cw(c3803,542) v1(3803,550) ; 3794.99,734.65 ccw(c3803.99,734.69) 3796.8,729.27 cw(c3789.62,723.86) 3796.8,718.44 ccw(c3803.99,713.03) 3794.99,713.07 3794.99,697 3794.99,688.01 ccw(c3803,688.01) v1(3803,680) ; 3794.99,734.68 3794.99,798.96 ; 3794.99,799 3794.99,829.49 cw(c3800.99,829.49) 3801.03,835.49 3801.77,835.49 ccw(c3801.77,844.49) 3810.77,844.49 3810.77,866.98 cw(c3819.77,866.98) 3819.77,875.98 CON301.2@3827.36,875.98
  SIGNAL w6: v1(3803,550) cw(c3803,558) 3795,558 3795,672 cw(c3803,672) v1(3803,680)
P1_D_P: CON301.3 D301.1 U201.25 | length 848
  COMPONENT w6: U201.25@3352.94,509.59 3367.76,509.59 3370.6,506.75 3747.75,506.75 ccw(c3747.75,540) 3781,540 3781,542 ccw(c3773,542) v1(3773,550) ; CON301.3@3748.62,875.98 3756.21,875.98 cw(c3756.21,866.98) 3765.21,866.98 3765.21,844.49 ccw(c3774.21,844.49) 3774.21,835.49 3774.96,835.49 cw(c3774.99,829.49) 3780.99,829.49 3780.99,799 3780.99,758.13 cw(c3771.99,758.09) 3780.09,754.16 ccw(c3788.22,750.3) 3780.08,746.47 3780.13,746.38 cw(c3771.99,742.52) 3780.99,742.52 3780.99,687.99 cw(c3773,687.99) v1(3773,680)
  SIGNAL w6: v1(3773,550) ccw(c3773,558) 3781,558 3781,624 3781,627 3769.54,627 3769.54,653 3781,653 3781,658 3781,672 ccw(c3773,672) v1(3773,680)
P1_SSRX_N: CON301.5 D302.2 U201.30 | length 631.2
  COMPONENT w6: U201.30@3352.94,608.02 ccw(c3355.78,608.02) 3355.78,605.18 3519,605.18 3522,605.18 3522,637.95 3548,637.95 3548,605.18 3569,605.18 ccw(c3569,699.06) 3662.88,699.06 3662.88,751.7 3662.88,767.48 ccw(c3653.88,767.48) 3661.15,772.79 cw(c3668.38,778.14) 3661.13,783.47 ccw(c3653.88,788.8) 3662.88,788.8 ; CON301.5@3630.51,875.98 3638.1,875.98 cw(c3638.1,866.98) 3647.1,866.98 3647.1,844.49 ccw(c3656.1,844.49) 3656.1,835.49 3656.85,835.49 cw(c3656.88,829.49) 3662.88,829.49 3662.88,808 3662.88,788.85
P1_SSRX_P: CON301.6 D302.1 U201.29 | length 683.7
  COMPONENT w6: U201.29@3352.94,588.33 cw(c3355.78,588.33) 3355.78,591.18 3569,591.18 ccw(c3569,705.18) 3656.84,632.51 ; 3574.8,591.18 ccw(c3574.8,693.26) 3656.84,632.51 ; 3676.88,743.66 3676.88,699.06 3676.88,693.26 cw(c3574.8,693.26) 3656.84,632.51 ; 3676.88,743.7 cw(c3685.88,743.66) 3677.83,747.68 ccw(c3669.78,751.7) 3677.83,755.72 cw(c3685.88,759.73) 3676.88,759.69 ; 3676.88,759.73 3676.88,774.66 3676.88,808 3676.88,829.49 cw(c3682.88,829.49) 3682.92,835.49 3683.66,835.49 ccw(c3683.66,844.49) 3692.66,844.49 3692.66,866.98 cw(c3701.66,866.98) 3701.66,875.98 CON301.6@3709.25,875.98
P1_SSTX_N: C303.2 U201.27 | length 668.4
  COMPONENT w6: U201.27@3352.94,548.96 3374.64,548.96 3377.48,546.12 3638.4,546.12 ccw(c3638.4,639.6) 3704.47,573.47 ; 3704.5,573.5 3708.6,577.6 cw(c3757.85,528.35) 3708.64,577.64 cw(c3757.85,528.35) 3757.85,598 3816,598 3819,598 3819,630.7 3845,630.7 3845,598 3868,598 ccw(c3868,628.5) 3898.5,628.5 3898.5,634.78 ccw(c3887,634.78) C303.2@3887,646.28
P1_SSTX_P: C302.2 U201.26 | length 626.9
  COMPONENT w6: U201.26@3352.94,529.28 3374.64,529.28 3377.48,532.12 3638.47,532.12 ccw(c3638.47,639.44) 3714.35,563.55 3714.4,563.6 cw(c3763.65,514.35) 3714.44,563.64 cw(c3763.65,514.35) 3763.65,584 3873.8,584 ccw(c3873.8,622.7) 3900.24,594.44 ccw(c3873.8,622.7) 3902.06,596.26 ccw(c3873.8,622.7) 3912.5,622.7 3912.5,634.78 cw(c3924,634.78) C302.2@3924,646.28
P1_SSTX_PRE_N: C303.1 CON301.8 D303.2 | length 224.9
  COMPONENT w6: CON301.8@3866.73,875.98 3874.32,875.98 cw(c3874.32,866.98) 3883.32,866.98 3883.32,844.49 ccw(c3892.32,844.49) 3892.32,835.49 3893.07,835.49 cw(c3893.1,829.49) 3899.1,829.49 3899.1,805 3899.1,789.14 cw(c3890.1,789.1) 3897.24,783.62 ccw(c3904.38,778.14) 3897.27,772.63 cw(c3890.1,767.19) 3899.1,767.19 3899.1,693.82 cw(c3887,693.82) C303.1@3887,681.72
P1_SSTX_PRE_P: C302.1 CON301.9 D303.1 | length 223
  COMPONENT w6: 3913.1,744.11 3913.1,711 3913.1,692.61 ccw(c3924,692.61) C302.1@3924,681.72 ; 3913.1,744.16 cw(c3922.1,744.11) 3913.94,747.91 ccw(c3905.78,751.7) 3913.94,755.49 cw(c3922.1,759.28) 3913.1,759.23 ; 3913.1,759.28 3913.1,774.66 3913.1,805 3913.1,829.49 cw(c3919.1,829.49) 3919.14,835.49 3919.88,835.49 ccw(c3919.88,844.49) 3928.88,844.49 3928.88,866.98 cw(c3937.88,866.98) 3937.88,875.98 CON301.9@3945.47,875.98
P2_D_N: CON302.2 D304.2 U201.17 | length 2071.6
  COMPONENT w6: U201.17@3353.92,352.11 3374.64,352.11 3377.48,354.95 3417.33,354.95 cw(c3417.33,295.28) 3459.52,337.48 3459.6,337.4 ccw(c3501.61,379.41) 3459.72,337.28 ccw(c3501.61,379.41) 3501.5,320 ccw(c3501.61,379.41) 3501.61,320 4712.69,320 cw(c4712.69,292.69) v1@4732,312 ; 4875.11,713.18 4875.11,681 4875.11,548.05 ccw(c4902.05,548.05) v1@4883,529 ; 4875.11,713.23 cw(c4884.11,713.18) 4876.86,718.52 ccw(c4869.62,723.86) 4876.86,729.19 cw(c4884.11,734.53) 4875.11,734.49 4875.11,800.96 ; 4875.11,801 4875.11,829.49 cw(c4881.11,829.49) 4881.14,835.49 4881.89,835.49 ccw(c4881.89,844.49) 4890.89,844.49 4890.89,866.98 cw(c4899.89,866.98) 4899.89,875.98 CON302.2@4907.48,875.98
  SIGNAL w6: v1(4732,312) ccw(c4732,321.15) 4738.47,314.68 cw(c4750.11,303.04) 4750.11,319.5 4762,319.5 ccw(c4762,432.5) 4875,432.5 4875,509.69 cw(c4893.17,509.69) 4880.32,522.53 ccw(c4873.85,529) v1(4883,529)
P2_D_P: CON302.3 D304.1 U201.18 | length 2071.9
  COMPONENT w6: U201.18@3352.94,371.8 3374.64,371.8 3377.48,368.95 3423.13,368.95 cw(c3423.13,309.28) 3465.32,351.48 3469.42,347.38 ccw(c3501.72,379.67) 3469.48,347.32 ccw(c3501.72,379.67) 3501.62,334 ccw(c3501.72,379.67) 3501.72,334 4715.1,334 ccw(c4715.1,357.9) v1@4732,341 ; CON302.3@4828.74,875.98 4836.33,875.98 cw(c4836.33,866.98) 4845.33,866.98 4845.33,844.49 ccw(c4854.33,844.49) 4854.33,835.49 4855.08,835.49 cw(c4855.11,829.49) 4861.11,829.49 4861.11,801 4861.11,758.37 cw(c4852.11,758.33) 4860.15,754.29 ccw(c4868.22,750.3) 4860.18,746.26 cw(c4852.11,742.28) 4861.11,742.28 4861.11,638 4861.11,609 4850.4,609 4850.4,583 4861.11,583 4861.11,549.58 cw(c4833.42,549.58) v1@4853,530
  SIGNAL w6: v1(4732,341) cw(c4732,331.85) 4738.47,338.32 ccw(c4750.11,349.96) 4750.11,333.5 4762,333.5 ccw(c4762,432.5) 4861,432.5 4861,510.69 ; v1(4853,530) ccw(c4862.15,530) 4855.68,523.53 cw(c4842.83,510.69) 4860.99,511.14 ; 4861,510.69 ccw(c4842.83,510.69) 4860.99,511.14 ; 4861,510.69 4861,511.14
P2_SSRX_N: CON302.5 D305.2 U201.23 | length 1858.3
  COMPONENT w6: U201.23@3352.94,470.22 ccw(c3355.78,470.22) 3355.78,467.38 4668.38,467.38 ccw(c4668.38,542) 4743,542 4743,578 4743,581 4709.79,581 4709.79,607 4743,607 4743,629 4743,767.32 ccw(c4734,767.32) 4741.21,772.71 cw(c4748.38,778.14) 4741.19,783.54 ccw(c4734,788.96) 4743,789.01 4743,810 4743,829.49 ccw(c4737,829.49) 4736.97,835.49 4736.22,835.49 cw(c4736.22,844.49) 4727.22,844.49 4727.22,866.98 ccw(c4718.22,866.98) 4718.22,875.98 CON302.5@4710.63,875.98
P2_SSRX_P: CON302.6 D305.1 U201.22 | length 1815.3
  COMPONENT w6: U201.22@3352.94,450.54 cw(c3355.78,450.54) 3355.78,453.38 4674.18,453.38 ccw(c4674.18,536.2) 4757,536.2 4757,677 4757,743.9 ; 4757,743.94 cw(c4766,743.9) 4757.89,747.8 ccw(c4749.78,751.7) 4757.89,755.59 cw(c4766,759.49) 4757,759.45 ; 4757,759.49 4757,774.66 4757,810 4757,829.49 cw(c4763,829.49) 4763.03,835.49 4763.78,835.49 ccw(c4763.78,844.49) 4772.78,844.49 4772.78,866.98 cw(c4781.78,866.98) 4781.78,875.98 CON302.6@4789.37,875.98
P2_SSTX_N: C306.1 U201.20 | length 1873.5
  COMPONENT w6: U201.20@3352.94,411.17 3374.64,411.17 3377.48,408.32 4879.41,408.32 ccw(c4879.41,508.32) 4979.41,508.32 4979.41,525 4979.41,528 4947.29,528 4947.29,554 4979.41,554 4979.41,577 4979.41,614.87 ccw(c4968,614.87) C306.1@4968,626.28
P2_SSTX_P: C305.1 U201.19 | length 1831.2
  COMPONENT w6: U201.19@3352.94,391.48 3374.64,391.48 3377.48,394.32 4879.41,394.32 ccw(c4879.41,508.32) 4993.41,508.32 4993.41,614.87 cw(c5004.82,614.87) C305.1@5004.82,626.28
P2_SSTX_PRE_N: C306.2 CON302.8 D306.2 | length 244.5
  COMPONENT w6: CON302.8@4946.85,875.98 4954.44,875.98 cw(c4954.44,866.98) 4963.44,866.98 4963.44,844.49 ccw(c4972.44,844.49) 4972.44,835.49 4973.19,835.49 cw(c4973.22,829.49) 4979.22,829.49 4979.22,805 4979.22,789.29 cw(c4970.22,789.25) 4977.3,783.7 ccw(c4984.38,778.14) 4977.31,772.58 cw(c4970.22,767.03) 4979.22,767.03 4979.22,672.94 cw(c4968,672.94) C306.2@4968,661.72
P2_SSTX_PRE_P: C305.2 CON302.9 D306.1 | length 243.4
  COMPONENT w6: 4993.22,744.37 4993.22,711 4993.22,673.32 ccw(c5004.82,673.32) C305.2@5004.82,661.72 ; 4993.22,744.42 cw(c5002.22,744.37) 4994,748.04 ccw(c4985.78,751.7) 4994,755.36 cw(c5002.22,759.02) 4993.22,758.97 ; 4993.22,759.02 4993.22,774.66 4993.22,805 4993.22,829.49 cw(c4999.22,829.49) 4999.25,835.49 5000,835.49 ccw(c5000,844.49) 5009,844.49 5009,866.98 cw(c5018,866.98) 5018,875.98 CON302.9@5025.59,875.98
P3_D_N: CON303.2 D307.2 U201.9 | length 3179.6
  COMPONENT w6: CON303.2@541.34,964.57 541.34,956.98 ccw(c550.34,956.98) 550.34,947.98 572.83,947.98 cw(c572.83,938.98) 581.83,938.98 581.83,938.2 ccw(c587.83,938.2) 587.83,932.2 617.97,932.2 638.88,932.2 689.92,932.2 ; 689.97,932.2 ccw(c689.92,941.2) 695.31,933.99 cw(c700.7,926.78) 706.08,933.99 ccw(c711.47,941.2) 711.43,932.2 788.79,932.2 791.79,932.2 791.79,937.38 817.79,937.38 817.79,932.2 860,932.2 894.44,932.2 cw(c894.44,818.34) 974.95,898.85 1568.4,305.4 1570.52,303.28 1574.84,307.6 1593.23,289.22 1588.91,284.89 1599.4,274.4 1674.9,198.9 1707.8,166 v1(1718,166) ; v1(3066,213) 3069.79,213 3076.29,206.5 3092.59,206.5 cw(c3092.59,180.64) 3110.86,198.94 ; 3110.87,198.92 ccw(c3129.16,217.21) 3129.16,191.35 3156,191.35 ccw(c3156,228.73) 3189.28,211.71 ccw(c3156,228.73) 3192.42,220.32 ccw(c3156,228.73) 3193.38,228.73 3193.38,302.96 3190.54,305.81 U201.9@3190.54,327.51
  SIGNAL w6: v1(1718,166) cw(c1712.24,160.24) 1720.38,160.24 ccw(c1736.63,160.24) 1725.13,148.77 1729.54,144.36 ccw(c1756.96,171.78) 1756.96,133 1809.78,133 ccw(c1809.78,233) 1880.49,162.29 1890.87,172.67 cw(c1971.34,92.21) 1971.34,206 3059,206 v1(3066,213)
P3_D_P: CON303.3 D307.1 U201.10 | length 3179.4
  COMPONENT w6: CON303.3@541.34,885.83 541.34,893.42 cw(c550.34,893.42) 550.34,902.42 572.83,902.42 ccw(c572.83,911.42) 581.83,911.41 581.83,912.2 cw(c587.83,912.2) 587.83,918.2 719.27,918.2 cw(c719.27,909.2) 723.25,917.27 ccw(c727.14,925.38) 731.13,917.32 cw(c735.01,909.2) 735.02,918.2 788.79,918.2 894.38,918.2 cw(c894.38,818.2) 965.09,888.91 1170,684 1698,156 v1(1698,146) ; v1(3067,186) 3070.79,186 3077.29,192.5 3089.79,192.5 cw(c3089.79,173.9) 3102.95,187.05 ccw(c3126.37,210.47) 3103.01,186.99 ccw(c3126.37,210.47) 3126.29,177.35 ccw(c3126.37,210.47) 3126.37,177.35 3160.53,177.35 ccw(c3160.53,224.2) 3203.28,205.03 ccw(c3160.53,224.2) 3206.38,214.58 ccw(c3160.53,224.2) 3207.38,224.2 3207.38,302.96 3210.22,305.81 U201.10@3210.22,327.51
  SIGNAL w6: v1@1698,146 ccw(c1703.76,151.76) 1703.76,143.62 cw(c1703.76,127.37) 1715.24,138.86 1719.74,134.36 ccw(c1756.83,171.45) 1719.96,134.14 ccw(c1756.83,171.45) 1756.83,119 1809.87,119 ccw(c1809.87,232.79) 1890.33,152.33 1900.71,162.71 cw(c1971.42,92) 1971.42,192 3061,192 v1(3067,186)
P3_SSRX_N: CON303.5 D308.2 U201.15 | length 3305.4
  COMPONENT w6: CON303.5@541.34,767.72 541.34,775.31 cw(c550.34,775.31) 550.34,784.31 572.83,784.31 ccw(c572.83,793.31) 581.83,793.3 581.83,794.09 cw(c587.83,794.09) 587.83,800.09 691.29,800.09 cw(c691.33,791.09) 691.37,800.09 cw(c691.33,791.09) 695.32,799.16 ccw(c699.3,807.22) 703.29,799.15 cw(c707.28,791.09) 707.24,800.09 cw(c707.28,791.09) 707.32,800.09 771,800.09 ; 775,800.09 771,800.09 ; U201.15@3308.65,327.51 3308.65,305.81 3305.81,302.96 3305.81,176 cw(c3191.81,176) 3304.66,159.86 cw(c3191.81,176) 3207.95,63.15 cw(c3191.81,176) 3191.81,62 1706.17,62 cw(c1706.17,175.88) 1625.65,95.35 950.2,770.8 ccw(c879.49,700.09) 879.49,800.09 771,800.09
P3_SSRX_P: CON303.6 D308.1 U201.14 | length 3301.5
  COMPONENT w6: CON303.6@541.34,846.46 541.34,838.87 ccw(c550.34,838.87) 550.34,829.87 572.83,829.87 cw(c572.83,820.87) 581.83,820.87 581.83,820.09 ccw(c587.83,820.09) 587.83,814.09 600,814.09 662.15,814.09 ; 662.2,814.09 ccw(c662.15,823.09) 667.5,815.85 cw(c672.86,808.62) 678.24,815.83 ccw(c683.56,823.09) 683.52,814.09 ; 683.56,814.09 695.82,814.09 775,814.09 879.55,814.09 cw(c879.55,700.23) 960.06,780.74 964.4,776.4 966.52,774.28 974,781.76 992.39,763.37 984.91,755.89 1016.9,723.9 1635.51,105.29 ccw(c1706.22,176) 1706.22,76 3191.81,76 ccw(c3191.81,176) 3201.47,76.47 ccw(c3191.81,176) 3291.34,166.34 ccw(c3191.81,176) 3291.81,176 3291.81,302.96 3288.96,305.81 U201.14@3288.96,327.51
P3_SSTX_N: C308.1 U201.12 | length 2878.6
  COMPONENT w6: C308.1@905.22,1024 cw(c916.72,1024) 916.72,1035.5 990.08,1035.5 cw(c990.08,935.5) 1060.79,1006.21 1901.65,165.35 ccw(c1982.17,245.88) 1982.17,132 3173,132 ccw(c3173,205.75) 3246.75,205.75 3246.75,324.66 cw(c3249.59,324.66) U201.12@3249.59,327.51
P3_SSTX_P: C309.1 U201.11 | length 2878.6
  COMPONENT w6: C309.1@905.22,1061 ccw(c916.72,1061) 916.72,1049.5 990.14,1049.5 cw(c990.14,935.65) 1070.65,1016.15 1072.77,1014.03 1080.54,1021.81 1098.93,1003.42 1091.15,995.65 1205.9,880.9 1911.51,175.29 ccw(c1982.22,246) 1982.22,146 3173,146 ccw(c3173,205.75) 3232.75,205.75 3232.75,324.66 ccw(c3229.91,324.66) U201.11@3229.91,327.51
P3_SSTX_PRE_N: C308.2 CON303.8 D309.2 | length 358.2
  COMPONENT w6: CON303.8@541.34,1003.94 541.34,1011.53 cw(c550.34,1011.53) 550.34,1020.53 572.83,1020.53 ccw(c572.83,1029.53) 581.83,1029.53 581.83,1030.31 cw(c587.83,1030.31) 587.83,1036.31 690.9,1036.31 cw(c690.9,1027.31) 695.15,1035.24 ccw(c699.3,1043.22) 703.56,1035.29 cw(c707.71,1027.31) 707.72,1036.31 739,1036.31 845.2,1036.31 857.48,1036.31 cw(c857.48,1024) C308.2@869.78,1024
P3_SSTX_PRE_P: C309.2 CON303.9 D309.1 | length 358
  COMPONENT w6: CON303.9@541.34,1082.68 541.34,1075.09 ccw(c550.34,1075.09) 550.34,1066.09 572.83,1066.09 cw(c572.83,1057.09) 581.83,1057.09 581.83,1056.31 ccw(c587.83,1056.31) 587.83,1050.31 613,1050.31 662.46,1050.31 ccw(c662.46,1059.31) 667.66,1051.96 cw(c672.86,1044.62) 678.06,1051.96 ccw(c683.26,1059.31) 683.26,1050.31 859.09,1050.31 ccw(c859.09,1061) C309.2@869.78,1061